# EAGLE board muscleSensor (EAGLE 7.2.0)
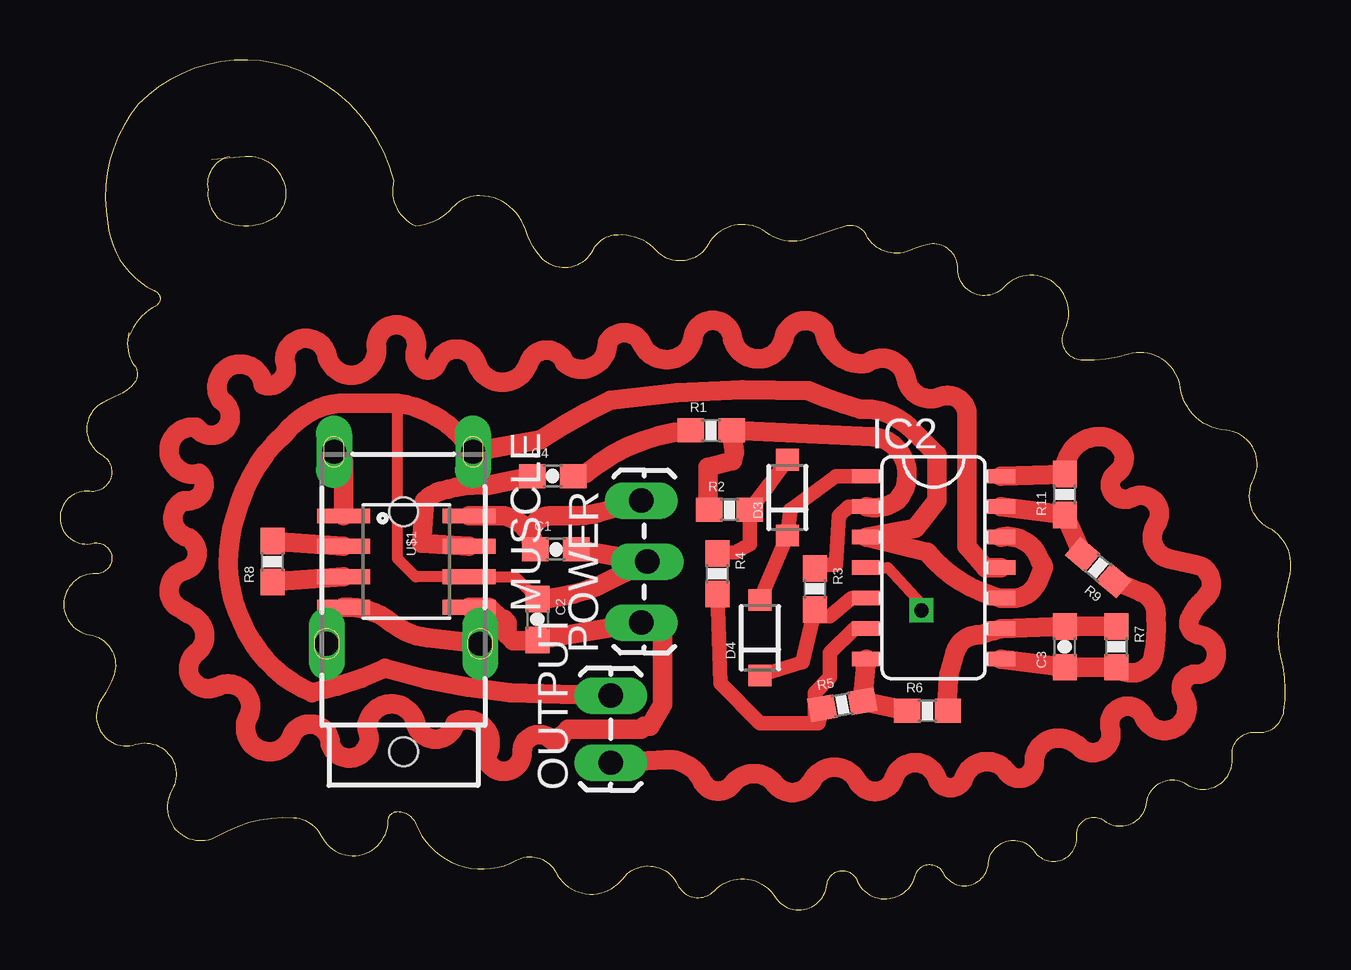
[diagram p0: board, top side]
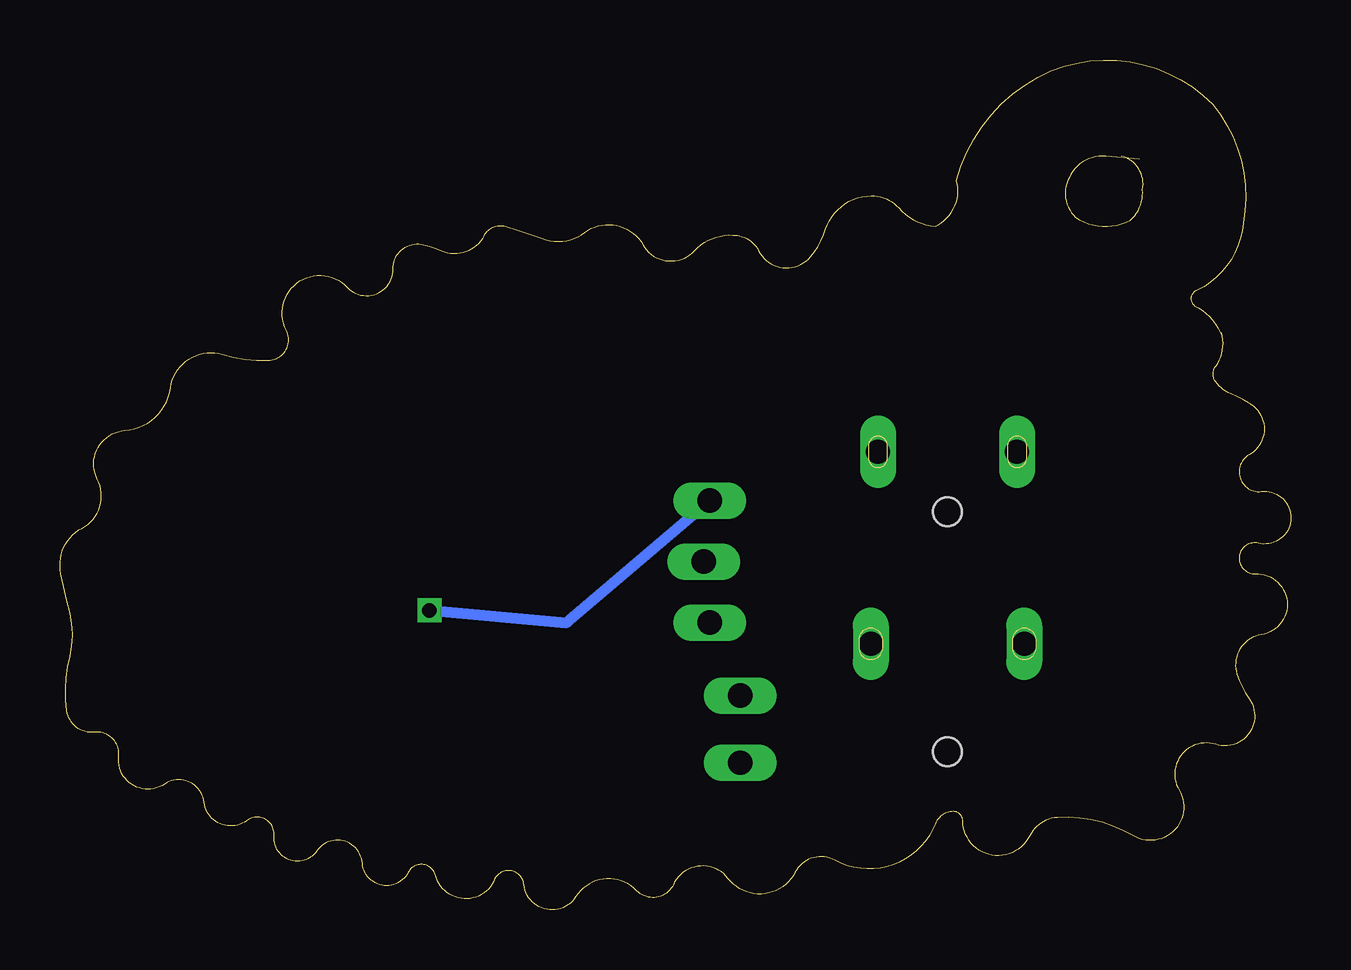
[diagram p1: board, bottom side, seen from below]

Size 51.31 x 35.41 mm. Coordinates in mm from the lower left corner, seen from the top.
Outline: 2.89,23.91 arc-44 4.03,25.18 arc128 3.9,25.82 arc-59 2,28.61 arc-50 3.27,33.56 arc-68 10,34.96 arc-52 13.94,30.39 arc80 14.83,28.48 arc44 16.35,29.25 arc-49 17.49,29.75 arc-72 19.4,28.36 arc22 20.03,27.21 arc113 22.19,27.47 arc-55 23.08,28.1 arc-55 24.86,27.47 arc108 27.02,27.72 arc-97 29.43,28.23 arc57 31.21,27.98 arc-4 32.73,28.48 arc-79 33.62,28.1 arc86 35.4,27.47 arc-10 36.16,27.72 arc-104 37.43,26.71 arc138 39.34,25.94 arc-164 41.88,24.17 arc116 42.64,22.9 arc17 44.54,23.15 arc-98 46.7,21.75 arc78 48.61,19.98 arc-113 49.75,17.94 arc89 50.39,15.91 arc-74 51.27,14.01 arc-2 50.89,12.36 arc28 50.89,10.58 arc-22 51.02,8.29 arc-89 49.88,7.4 arc103 48.86,6.39 arc-131 46.96,5.24 arc117 45.31,4.48 arc-120 43.53,3.72 arc132 42.38,3.08 arc-151 40.61,2.45 arc141 38.7,1.94 arc-149 36.8,1.56 arc139 35.65,1.43 arc-139 33.24,1.18 arc157 31.97,1.05 arc-142 29.81,0.54 arc104 27.27,0.8 arc-111 25.75,1.05 arc117 23.46,1.31 arc-115 20.67,1.56 arc91 19.02,2.07 arc-97 14.83,3.59 arc68 14.06,4.1 arc89 13.68,3.72 arc-153 10.89,3.08 arc60 9.75,3.85 arc34 6.57,3.08 arc-151 4.67,4.99 arc138 3.14,6.89 arc-143 1.74,8.8 arc18 2.25,9.82 arc99 1.24,11.47 arc-173 1.49,14.01 arc196 1.36,15.28 arc-201 1.24,17.44 arc157 1.74,18.96 arc-121 1.74,21.12 arc-6 2.51,21.5 arc31 3.14,22.01 arc72 3.14,22.64 arc-52 2.89,24.04
Outline: 6.32,31.28 7.71,31.41 arc-71 9.24,30.52 arc-77 8.98,28.87 arc-62 6.7,28.74 arc-54 6.19,30.01 arc-88 7.08,31.41
Copper layers (1*16): Top 0.035mm / dielectric 1.5mm / Bottom 0.035mm
Design rules "default": minimum track width 10mil, minimum drill 24mil, track to track 8mil, track to pad 8mil, pad to pad 8mil, via to via 8mil, smd to smd 8mil, copper to edge 40mil, drill to drill 8mil, minimum pad ring 10mil, minimum via ring 8mil, stop-mask expansion 4mil, vias tented up to drill 0mil, thermal gap 10mil

## Footprints (pad centres in the part's own frame; a part is rotated, then mirrored left to right if it is on the bottom)
0603-CAP = smd 1.1 x 1: 1 -0.85,0; 2 0.85,0
SOD-123 = smd 0.9 x 0.95: A 1.575,0; C -1.575,0
SO014 = smd 0.6 x 1.2: 1 -3.175,-2.8; 2 -1.905,-2.8; 3 -0.635,-2.8; 4 0.635,-2.8; 5 1.905,-2.8; 6 3.175,-2.8; 7 4.445,-2.8; 8 4.445,2.8; 9 3.175,2.8; 10 1.905,2.8; 11 0.635,2.8; 12 -0.635,2.8; 13 -1.905,2.8; 14 -3.175,2.8
1503_08 = drill 1 pad 1.2 long: 1 -2.9,-8; 2@1 -3.2,0; 2@2 3.2,0; 3 2.9,-8 | hole 1.2: 0,4.5; 0,-5.5
1X02_LOCK_LONGPADS = drill 1.016 long: 1 -0.127,0; 2 2.667,0
1X03_LOCK_LONGPADS = drill 1.016 long: 1 0,0; 2 2.54,-0.254; 3 5.08,0
0603-RES = smd 1.1 x 1: 1 -0.85,0; 2 0.85,0
SO08 = smd 0.61 x 2.21: 1 -1.905,-2.616; 2 -0.635,-2.616; 3 0.635,-2.616; 4 1.905,-2.616; 5 1.905,2.616; 6 0.635,2.616; 7 -0.635,2.616; 8 -1.905,2.616

## Placement (x,y rotation side)
C1  1.0uF  [0603-CAP]  20.67,15.02 0 top
C2  1.0uF  [0603-CAP]  19.91,12.1 270 top
C3  1.0uF  [0603-CAP]  41.88,10.96 90 top
C4  0.01uF  [0603-CAP]  20.54,18.07 0 top
D3  IN4148  [SOD-123]  30.32,17.18 90 top
D4  IN4148  [SOD-123]  29.18,11.34 90 top
IC2  LMV324  [SO014]  36.42,14.9 270 top
MUSCLE  1503_08  [1503_08]  14.32,11.09 180 top
OUTPUT  [1X02_LOCK_LONGPADS]  22.95,6.26 90 top
POWER  [1X03_LOCK_LONGPADS]  24.22,11.97 90 top
R1  150K  [0603-RES]  27.14,19.98 0 top
R2  330  [0603-RES]  27.91,16.67 0 top
R3  150K  [0603-RES]  31.46,13.37 270 top
R4  150K  [0603-RES]  27.4,14.01 270 top
R5  330  [0603-RES]  32.61,8.55 10 top
R6  80.6  [0603-RES]  36.16,8.29 0 top
R7  80.6  [0603-RES]  44.04,10.96 270 top
R8  240  [0603-RES]  8.86,14.51 90 top
R9  1K  [0603-RES]  43.27,14.26 140 top
R11  820K  [0603-RES]  41.88,17.31 90 top
U$1  ACS712  [SO08]  14.44,14.51 270 top

## Library data of the parts
C1-C3 = SparkFun-Capacitors; PROD_ID: CAP-00868
C4 = SparkFun-Capacitors; PROD_ID: CAP-00810
D3 D4 = SparkFun-DiscreteSemi; PROD_ID: DIO-12440
IC2 = SparkFun-AnalogIC; PROD_ID: IC-08227
MUSCLE = con-lumberg; OC_FARNELL: unknown; OC_NEWARK: unknown
OUTPUT POWER = SparkFun-Connectors
R1-R7 R11 = SparkFun-Resistors; PROD_ID: RES-09117
R8 = SparkFun-Resistors; PROD_ID: RES-07849
R9 = SparkFun-Resistors; PROD_ID: RES-07856
U$1 = SparkFun-AnalogIC

## Nets
+VS: C1.1 IC2.4 POWER.3 U$1.8
-VS: C2.2 IC2.11 POWER.1 U$1.5
END: MUSCLE.3 U$1.1
GND: C1.2 C2.1 IC2.3 IC2.10 IC2.12 MUSCLE.1 OUTPUT.2 POWER.2 U$1.6
MEASURE: C4.1 U$1.7
MID: MUSCLE.2@1 U$1.4
N$1: IC2.2 R1.2 R2.1 R3.1
N$2: C4.2 R1.1
N$4: D3.A R2.2 R4.1
N$5: IC2.6 R4.2 R5.1
N$6: R8.2 U$1.2
N$7: R8.1 U$1.3
N$8: D4.C IC2.5 R3.2
N$9: C3.2 IC2.9 R6.2 R7.1
N$10: IC2.13 R9.2 R11.1
N$11: D3.C D4.A IC2.1
RECTIFY: IC2.7 R5.2 R6.1
SIG: IC2.14 OUTPUT.1 R11.2
SMOOTH: C3.1 IC2.8 R7.2 R9.1

## Tracks (layer width: path | path; a pad name or v marks a point on that pad's centre or on a via)
+VS  (via drill 0.6)
  Top 0.457: IC2.4 34.51,14.26 35.91,12.74 v35.91,12.48
  Top 0.813: U$1.8 18.51,16.42 arc-71 C1.1 arc-128 20.41,16.42 arc-3 21.3,16.42 arc15 22.45,16.55 POWER.3
  Bottom 0.457: v35.91,12.48 30.19,11.97 POWER.3
-VS
  Top 0.813: U$1.5 17.87,12.61 18.38,12.1 18.51,12.1 18.64,11.97 18.64,11.47 18.89,11.21 19.87,11.21 C2.2 POWER.1 25.11,11.59 25.11,8.55 24.6,7.66 24.35,7.66 24.22,7.53 21.18,7.53 20.92,7.28 arc-125 20.41,7.15 arc136 19.27,6.51 arc-167 17.75,6.39 arc157 16.48,7.78 arc-157 14.83,7.78 arc169 12.79,7.53 arc-189 11.27,6.89 arc163 9.62,7.15 arc-182 7.84,8.04 arc145 6.57,9.31 arc-170 5.68,10.7 arc114 5.55,12.23 arc-6 4.92,12.61 arc-131 5.17,14.13 arc140 5.3,15.53 arc-139 5.17,17.05 arc148 5.81,18.2 arc-206 5.68,20.1 arc206 6.7,21.25 arc-207 8.48,21.88 arc134 9.36,22.9 arc-176 11.14,23.02 arc174 13.17,23.53 arc-198 14.83,23.28 arc89 15.21,22.52 arc91 15.71,22.77 arc-144 17.37,22.77 arc144 19.52,22.77 arc-144 21.05,22.77 arc131 22.83,23.66 arc-117 24.22,23.66 arc145 26.38,23.79 arc-173 28.03,23.79 arc158 30.19,23.91 arc-126 31.84,24.17 arc92 33.62,22.77 arc-118 35.27,22.13 arc102 36.67,21.37 arc-113 37.81,20.61 37.81,15.15 38.57,14.26 IC2.11
END
  Top 0.813: U$1.1 11.83,18.67 MUSCLE.3
GND
  Top 0.457: 14.06,21.12 14.06,14.64 14.83,13.88 U$1.6 18.98,13.88 C2.1
  Top 0.813: C2.1 arc20 22.45,13.5 POWER.2 C1.2 | IC2.12 arc-86 40.86,14.51 arc-51 40.99,14.26 arc-8 40.73,13.63 arc-64 39.72,12.99 IC2.10 arc-37 36.16,14.9 IC2.3 35.65,15.91 36.54,17.05 36.54,18.96 35.4,20.1 arc49 33.37,20.86 arc-8 31.21,21.63 arc11 22.95,21.25 arc7 20.03,19.59 arc1 MUSCLE.1 arc48 14.06,21.12 arc-3 11.65,21.12 arc45 9.36,19.85 arc34 7.33,16.42 arc45 7.59,11.97 arc44 10.51,9.05 arc12 13.56,10.07 arc12 18.76,9.05 OUTPUT.2
MEASURE
  Top 0.813: C4.1 17.87,17.69 arc24 15.84,17.44 arc29 15.21,17.05 15.08,15.28 U$1.7
MID
  Top 0.813: MUSCLE.2@1 15.33,11.34 arc-32 13.81,11.97 arc42 U$1.4
N$1
  Top 0.61: IC2.2 32.86,16.8 32.48,16.42 32.35,14.39 | 32.35,14.64 32.35,14.39 | 32.35,14.39 31.76,14.39 R3.1
  Top 0.813: IC2.2 arc49 34.89,17.05 arc127 33.88,19.72 R1.2 28.12,19.05 28.03,18.71 27.02,18.45 27.02,16.89 R2.1
N$2
  Top 0.813: C4.2 21.94,18.2 arc-36 R1.1
N$4
  Top 0.61: D3.A 29.57,17.74 R2.2 28.76,15.24 28.16,14.9 28.2,14.9 R4.1
N$5
  Top 0.61: IC2.6 33.11,11.72 32.1,10.7 32.1,9.69 31.46,9.05 31.46,7.94 R5.1 31.62,7.78 29.18,7.78 27.53,9.43 R4.2
N$6
  Top 0.813: R8.2 U$1.2
N$7
  Top 0.813: R8.1 U$1.3
N$8
  Top 0.61: IC2.5 32.99,12.99 32.1,12.23 31.42,12.23 R3.2 30.95,10.32 29.35,9.82 D4.C
N$9
  Top 0.813: R7.1 C3.2 IC2.9 arc-1 38.32,11.47 arc77 37.3,10.7 arc4 37.05,9.82 arc11 R6.2
N$10
  Top 0.813: IC2.13 R11.1 R9.2
N$11
  Top 0.61: D4.A D3.C 30.45,16.67 32.35,18.07 IC2.1
RECTIFY
  Top 0.813: R6.1 R5.2 IC2.7
SIG
  Top 0.813: IC2.14 R11.2 arc-37 42.13,19.09 arc-54 43.27,19.72 arc-50 44.16,19.34 arc-96 44.04,18.2 arc173 44.67,17.18 arc-154 45.69,16.04 arc110 46.19,14.64 arc5 47.34,14.39 arc-129 47.72,12.99 arc27 47.08,12.1 arc106 47.46,11.47 arc-176 47.34,9.82 arc126 46.83,8.93 arc-189 45.18,8.04 arc173 43.78,7.53 arc-151 42.51,6.77 arc36 41.75,7.15 arc101 40.61,6.13 arc-147 39.46,5.75 arc126 37.69,5.5 arc-143 36.54,5.5 arc143 34.76,5.5 arc-133 33.24,5.37 arc124 31.34,5.37 arc-114 29.81,5.24 arc105 28.03,5.24 arc-116 26.76,5.37 arc67 25.24,6.26 OUTPUT.1
SMOOTH
  Top 0.813: IC2.8 C3.1 R7.2 arc106 45.56,10.45 arc16 45.69,12.23 arc74 45.05,13.24 R9.1